# Altium PCB bootleg-1 - plate.PcbDoc
Units mm, origin at the board's own origin, x right, y up, seen from the top; angles counter-clockwise.
Board outline 296 x 105.06 mm, 2 copper layers (Component Side, Bottom Layer), stack 1.571 mm thick; 65 components, 99 nets, 179 pads, 0 vias.
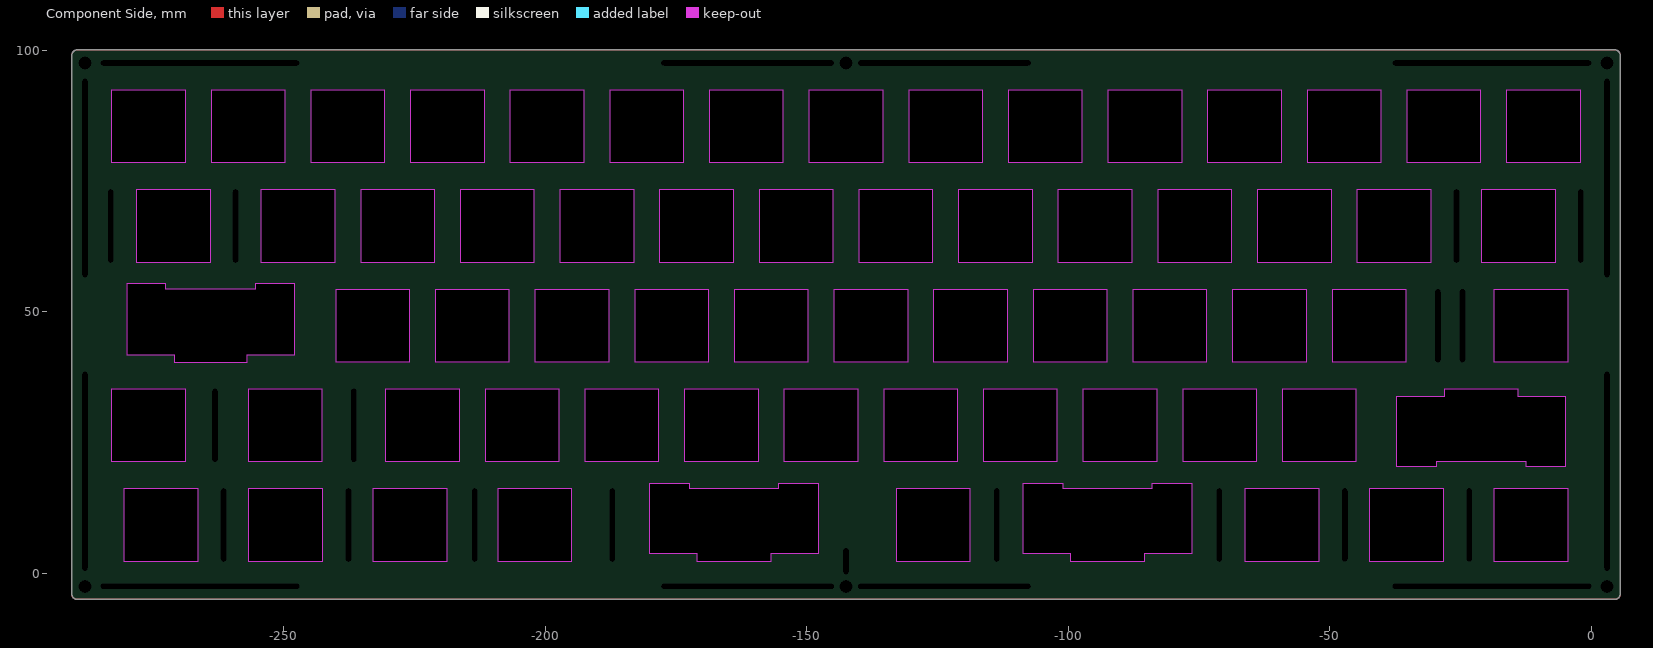
[diagram p0: Component Side view]
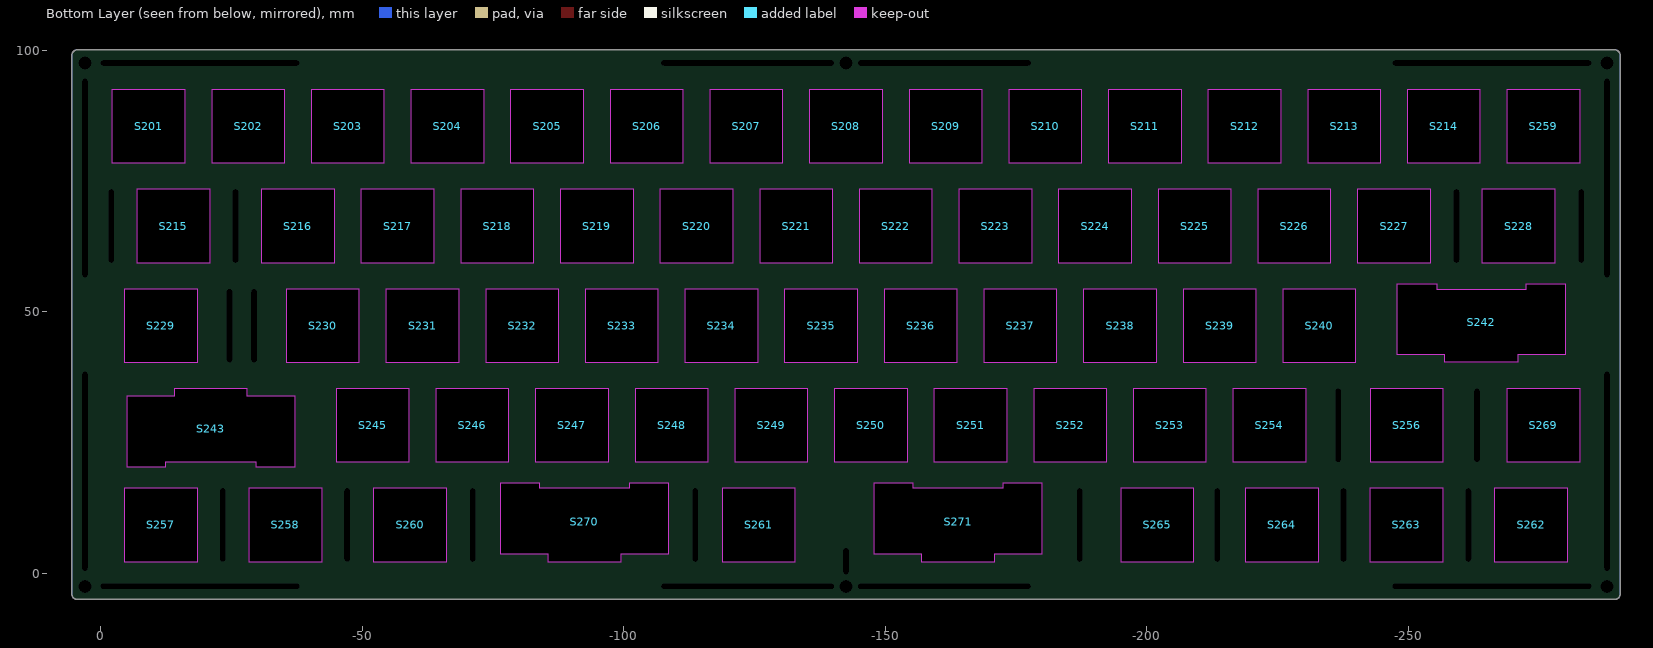
[diagram p1: Bottom Layer view, seen from below]

## Layer stack, top to bottom
Top Solder: solder mask 0.0102, Solder Resist, Dk 3.5
Component Side: signal copper 0.0356
Dielectric 1: core 1.5, FR-4, Dk 4.2
Bottom Layer: signal copper 0.0356
Solder Side: solder mask 0.0102, Solder Resist, Dk 3.5

## Board outline
-290.501,-4.017 -290.501,99.039 cw(c-289.501,99.039) -289.501,100.039 4.499,100.039 cw(c4.499,99.039) 5.499,99.039 5.499,-4.017 cw(c4.499,-4.017) 4.499,-5.017 -289.501,-5.017 cw(c-289.501,-4.017)

## Design rules (kind name [scope] priority, off if disabled: settings)
Clearance [All] p1: gap=0.2 ignorepadtopadclearanceinfootprint=FALSE except(0: Arc-Hole Track-Hole SMDPad-Hole THPad-Hole Via-Hole Fill-Hole Poly-Hole Region-Hole Text-Hole; 0.254: THPad-THPad THPad-Via THPad-Fill THPad-Poly THPad-Region THPad-Text Via-Via Via-Fill Via-Poly Via-Region Via-Text Fill-Fill Fill-Poly Fill-Region Fill-Text Poly-Poly Poly-Region Poly-Text Region-Region Region-Text Text-Text)
ComponentClearance [InComponent('No Component') And OnLayer('Component Side')] p1: gap=0.254 collisioncheckmode=3 verticalgap=0.254 showdistances=FALSE
DiffPairsRouting DiffPairsRouting_USB [InDifferentialPairClass('All Differential Pairs')] p1: maxlimit=0.254 minlimit=0.203 mostfreqgap=0.203 toplayer_minwidth=0.152 toplayer_maxwidth=0.381 toplayer_prefwidth=0.152 bottomlayer_minwidth=0.152 bottomlayer_maxwidth=0.381 bottomlayer_prefwidth=0.152 maxuncoupledlength=12.7
DiffPairsRouting [All] p2: maxlimit=0.254 minlimit=0.254 mostfreqgap=0.254 toplayer_minwidth=0.381 toplayer_maxwidth=0.381 toplayer_prefwidth=0.381 bottomlayer_minwidth=0.381 bottomlayer_maxwidth=0.381 bottomlayer_prefwidth=0.381 maxuncoupledlength=12.7
HoleSize [All] p1: absolutevalues=TRUE maxlimit=20 minlimit=0.025 maxpercent=80.000 minpercent=20.000
MatchedLengths MatchedLengths_USB_DiffPairs_1 [All] p1: tolerance=0.127 checknetsindiffpair=TRUE checkdiffpairvsdiffpair=FALSE checkxsignals=FALSE checkothers=FALSE
MatchedLengths MatchedLengths_USB_DiffPairs [All] p2: tolerance=0.127 checknetsindiffpair=TRUE checkdiffpairvsdiffpair=FALSE checkxsignals=FALSE checkothers=FALSE
PolygonConnect PolygonConnect_1 [All vs IsVia] p1: connectstyle=Direct reliefconductorwidth=0.254 reliefentries=4 polygonreliefangle="90 Angle" airgapwidth=0.254
PolygonConnect [All] p2: connectstyle=Relief reliefconductorwidth=0.254 reliefentries=4 polygonreliefangle="90 Angle" airgapwidth=0.254
RoutingVias [All] p1: holewidth=0.711 width=1.27 viastyle="Through Hole" minholewidth=0.711 minwidth=1.27 maxholewidth=0.711 maxwidth=1.27
SolderMaskExpansion [All] p1: expansion=0.102 istentingtop=FALSE
Width [All] p1: maxlimit=0.254 minlimit=0.203 preferedwidth=0.254
27 further rules are at their usual default settings.

## Classes and differential pairs
component class Designator: C201 C202 C203 C204 C205 C206
differential pair D_PRE: +D_PRE_P -D_PRE_N
differential pair D: +D_P -D_N

## Components (designator, comment, footprint, x,y, rotation, side; value= is the part's Value field where it differs from the comment)
S201 "MX" Plate_MX_1U -9.15,85.415 r180 bottom
S202 "MX" Plate_MX_1U -28.2,85.415 r180 bottom
S203 "MX" Plate_MX_1U -47.25,85.415 r180 bottom
S204 "MX" Plate_MX_1U -66.3,85.415 r180 bottom
S205 "MX" Plate_MX_1U -85.35,85.415 r180 bottom
S206 "MX" Plate_MX_1U -104.4,85.415 r180 bottom
S207 "MX" Plate_MX_1U -123.45,85.415 r180 bottom
S208 "MX" Plate_MX_1U -142.5,85.415 r180 bottom
S209 "MX" Plate_MX_1U -161.55,85.415 r180 bottom
S210 "MX" Plate_MX_1U -180.6,85.415 r180 bottom
S211 "MX" Plate_MX_1U -199.65,85.415 r180 bottom
S212 "MX" Plate_MX_1U -218.7,85.415 r180 bottom
S213 "MX" Plate_MX_1U -237.75,85.415 r180 bottom
S214 "MX" Plate_MX_1U -256.8,85.415 r180 bottom
S215 "MX" PLATE_MX_1.5U -13.912,66.365 r180 bottom
S216 "MX" Plate_MX_1U -37.725,66.365 r180 bottom
S217 "MX" Plate_MX_1U -56.775,66.365 r180 bottom
S218 "MX" Plate_MX_1U -75.825,66.365 r180 bottom
S219 "MX" Plate_MX_1U -94.875,66.365 r180 bottom
S220 "MX" Plate_MX_1U -113.925,66.365 r180 bottom
S221 "MX" Plate_MX_1U -132.975,66.365 r180 bottom
S222 "MX" Plate_MX_1U -152.025,66.365 r180 bottom
S223 "MX" Plate_MX_1U -171.075,66.365 r180 bottom
S224 "MX" Plate_MX_1U -190.125,66.365 r180 bottom
S225 "MX" Plate_MX_1U -209.175,66.365 r180 bottom
S226 "MX" Plate_MX_1U -228.225,66.365 r180 bottom
S227 "MX" Plate_MX_1U -247.275,66.365 r180 bottom
S228 "MX" PLATE_MX_1.5U -271.087,66.365 r180 bottom
S229 "MX" "PLATE_MX - CAPS - stepped" -16.294,47.315 r180 bottom
S230 "MX" Plate_MX_1U -42.487,47.315 r180 bottom
S231 "MX" Plate_MX_1U -61.537,47.315 r180 bottom
S232 "MX" Plate_MX_1U -80.587,47.315 r180 bottom
S233 "MX" Plate_MX_1U -99.637,47.315 r180 bottom
S234 "MX" Plate_MX_1U -118.687,47.315 r180 bottom
S235 "MX" Plate_MX_1U -137.737,47.315 r180 bottom
S236 "MX" Plate_MX_1U -156.787,47.315 r180 bottom
S237 "MX" Plate_MX_1U -175.837,47.315 r180 bottom
S238 "MX" Plate_MX_1U -194.887,47.315 r180 bottom
S239 "MX" Plate_MX_1U -213.937,47.315 r180 bottom
S240 "MX" Plate_MX_1U -232.987,47.315 r180 bottom
S242 "MX" "PLATE_MX - Enter_ANSI" -263.95,47.315 r0 bottom
S243 "MX" "PLATE_MX - Left shift ANSI" -21.056,28.265 r0 bottom
S245 "MX" Plate_MX_1U -52.012,28.265 r180 bottom
S246 "MX" Plate_MX_1U -71.062,28.265 r180 bottom
S247 "MX" Plate_MX_1U -90.112,28.265 r180 bottom
S248 "MX" Plate_MX_1U -109.162,28.265 r180 bottom
S249 "MX" Plate_MX_1U -128.212,28.265 r180 bottom
S250 "MX" Plate_MX_1U -147.262,28.265 r180 bottom
S251 "MX" Plate_MX_1U -166.312,28.265 r180 bottom
S252 "MX" Plate_MX_1U -185.362,28.265 r180 bottom
S253 "MX" Plate_MX_1U -204.412,28.265 r180 bottom
S254 "MX" Plate_MX_1U -223.462,28.265 r180 bottom
S256 "MX" Plate_MX_1U -249.682,28.265 r180 bottom
S257 "MX" PLATE_MX_1.5U -11.531,9.215 r180 bottom
S258 "MX" Plate_MX_1U -35.338,9.215 r180 bottom
S259 "MX" Plate_MX_1U -275.85,85.415 r180 bottom
S260 "MX" PLATE_MX_1.5U -59.156,9.215 r180 bottom
S261 "MX" PLATE_MX_1.5U -125.823,9.215 r180 bottom (schematic designator S260)
S262 "MX" PLATE_MX_1.5U -273.468,9.215 r180 bottom (schematic designator S260)
S263 "MX" PLATE_MX_1.5U -249.65,9.215 r180 bottom (schematic designator S260)
S264 "MX" PLATE_MX_1.5U -225.843,9.215 r180 bottom (schematic designator S260)
S265 "MX" PLATE_MX_1.5U -202.031,9.215 r180 bottom (schematic designator S260)
S269 "MX" Plate_MX_1U -275.85,28.265 r180 bottom
S270 "MX" "PLATE_MX - Left shift ANSI" -92.493,9.215 r180 bottom
S271 "MX" "PLATE_MX - Left shift ANSI" -163.931,9.215 r180 bottom (schematic designator S270)

## Footprints (in the part's own frame and the unit in brackets; to place one, negate y for a bottom-side part, rotate by r counter-clockwise, add the part's x,y. Pads: shape width x height; smd on the part's side, far side on the other; paste and mask are expansions set on the pad)
"PLATE_MX - CAPS - stepped" [mm]
  round 1 on Mech14: ""(-4.763,0) ""(-4.763,0)
  Component Side pour cut-out: -11.763,-7 2.238,-7 2.238,7 -11.763,7
  Keep-Out Layer board cut-out: -11.763,-7 2.238,-7 2.238,7 -11.763,7
"PLATE_MX - Enter_ANSI" [mil]
  round 157.01 on Mech14: ""(-470,-325) ""(470,-325)
  round 120 on Mech14: ""(-470,275) ""(470,275)
  round 39.37 on Mech14: ""(0,0) ""(0,0) ""(0,0)
  Keep-Out Layer board cut-out: -633.86,-313.78 -633.86,217.71 -275.59,217.72 -275.59,275.59 275.59,275.59 275.59,217.71 633.86,217.71 633.86,-313.77 333.68,-313.77 333.69,-275.58 -337.64,-275.58 -337.64,-313.78
"PLATE_MX - Left shift ANSI" [mil]
  round 120 on Mech14: ""(-470,-275) ""(470,-275)
  round 157.01 on Mech14: ""(-470,325) ""(470,325)
  round 39.37 on Mech14: ""(0,0)
  Keep-Out Layer board cut-out: 633.86,313.78 337.64,313.78 337.64,275 -337.64,275 -337.64,313.78 -635,313.78 -635,-217.73 -275.59,-217.73 -275.59,-275.59 275.59,-275.59 275.59,-217.72 633.86,-217.72
PLATE_MX_1.5U [mm]
  round 1 on Mech14: ""(0,0) ""(0,0)
  Component Side pour cut-out: -7,-7 7,-7 7,7 -7,7
  Keep-Out Layer board cut-out: -7,-7 7,-7 7,7 -7,7
Plate_MX_1U [mm]
  round 1 on Mech14: ""(0,0) ""(0,0)
  Component Side pour cut-out: -7,-7 7,-7 7,7 -7,7
  Keep-Out Layer board cut-out: -7,-7 7,-7 7,7 -7,7

## Part data
S201 S202 S203 S204 S205 S206 S207 S208 S209 S210 S211 S212 S213 S214 S216 S217 S218 S219 S220 S221 S222 S223 S224 S225 S226 S227 S228 S229 S230 S231 S232 S233 S234 S235 S236 S237 S238 S239 S240 S242 S243 S245 S246 S247 S248 S249 S250 S251 S252 S253 S254 S256 S257 S258 S259 S260 S261 S262 S263 S264 S265 S269 S270 S271: library part SW-PB, "Switch"
S215: library part SW-PB, "TAB"

## Free pads (board coordinates)
  round 0 hole 1 slot 38 at 90 deg unplated: ""(-288.001,75.538) ""(-288,19.483) ""(2.999,75.538) ""(3,19.483)
  round 0 hole 2.5 unplated: ""(-288.001,-2.517) ""(-288.001,97.539) ""(-142.501,-2.517) ""(-142.501,97.539) ""(2.999,-2.517) ""(2.999,97.539)
  round 0 hole 1 slot 14 at 90 deg unplated: ""(-283.083,66.365) ""(-263.144,28.265) ""(-261.493,9.215) ""(-259.207,66.365) ""(-237.617,9.215) ""(-236.601,28.265) ""(-213.487,9.215) ""(-187.198,9.215) ""(-113.665,9.215) ""(-71.12,9.215) ""(-47.117,9.215) ""(-29.337,47.315) ""(-25.781,66.365) ""(-24.638,47.315) ""(-23.368,9.215) ""(-2.032,66.365)
  round 0 hole 1 slot 38 at 0 deg unplated: ""(-266,-2.518) ""(-266,97.538) ""(-19.001,-2.517) ""(-19.001,97.539)
  round 0 hole 1 slot 33 at 0 deg unplated: ""(-161.301,-2.518) ""(-161.301,97.538) ""(-123.7,-2.517) ""(-123.7,97.539)
  round 0 hole 1 slot 5 at 90 deg unplated: ""(-142.494,2.286)

## Nets (pads, with @x,y where several pads share a name; then routed paths per layer and width w, separated by ;. In a path a pad name is that pad's centre, name@x,y a point inside that pad or via, vN(x,y) a via of type N, cw(c..) or ccw(c..) an arc to the next point about the centre after c; other vN are vias at no path point)
col1: 
col2: 
col3: 
col4: 
col5: 
col6: 
col7: 
col8: 
col9: 
col10: 
col11: 
col12: 
col13: 
col14: 
col15: 
D_N: 
D_P: 
D_PRE_N: 
D_PRE_P: 
GND: 
NetC301_2: 
NetC305_2: 
NetC306_2: 
NetCON301_A5: 
NetCON301_B5: 
NetD201_1: 
NetD202_1: 
NetD203_1: 
NetD204_1: 
NetD205_1: 
NetD206_1: 
NetD207_1: 
NetD208_1: 
NetD209_1: 
NetD210_1: 
NetD211_1: 
NetD212_1: 
NetD213_1: 
NetD214_1: 
NetD215_1: 
NetD216_1: 
NetD217_1: 
NetD218_1: 
NetD219_1: 
NetD220_1: 
NetD221_1: 
NetD222_1: 
NetD223_1: 
NetD224_1: 
NetD225_1: 
NetD226_1: 
NetD227_1: 
NetD228_1: 
NetD229_1: 
NetD230_1: 
NetD231_1: 
NetD232_1: 
NetD233_1: 
NetD234_1: 
NetD235_1: 
NetD236_1: 
NetD237_1: 
NetD238_1: 
NetD239_1: 
NetD240_1: 
NetD242_1: 
NetD243_1: 
NetD245_1: 
NetD246_1: 
NetD247_1: 
NetD248_1: 
NetD249_1: 
NetD250_1: 
NetD251_1: 
NetD252_1: 
NetD253_1: 
NetD254_1: 
NetD256_1: 
NetD257_1: 
NetD258_1: 
NetD259_1: 
NetD260_1: 
NetD262_1: 
NetD264_1: 
NetD265_1: 
NetD266_1: 
NetD267_1: 
NetD268_1: 
NetD269_1: 
NetD270_1: 
NetR302_1: 
PC2: 
PC4: 
PD0: 
PD2: 
PD4: 
RAW: 
RST: 
VCC: 
pads on no net: S201. S202. S203. S204. S205. S206. S207. S208. S209. S210. S211. S212. S213. S214. S215. S216. S217. S218. S219. S220. S221. S222. S223. S224. S225. S226. S227. S228. S229. S230. S231. S232. S233. S234. S235. S236. S237. S238. S239. S240. S242. S243. S245. S246. S247. S248. S249. S250. S251. S252. S253. S254. S256. S257. S258. S259. S260. S261. S262. S263. S264. S265. S269. S270. S271.

## Polygon pours and split planes (outlines as drawn)
no net on Component Side "Component Side-No Net" (solid, shelved, pour order 1): -290.501,-4.017 -290.501,99.039 cw(c-289.501,99.039) -289.501,100.039 4.499,100.039 cw(c4.499,99.039) 5.499,99.039 5.499,-4.017 cw(c4.499,-4.017) 4.499,-5.017 -289.501,-5.017 cw(c-289.501,-4.017)
no net on Bottom Layer "Bottom Layer-No Net" (solid, shelved, pour order 0): -290.501,-4.017 -290.501,99.039 cw(c-289.501,99.039) -289.501,100.039 4.499,100.039 cw(c4.499,99.039) 5.499,99.039 5.499,-4.017 cw(c4.499,-4.017) 4.499,-5.017 -289.501,-5.017 cw(c-289.501,-4.017)

## Silkscreen, mask and mechanical layers (free items; w line width, h text height)
outline:
  the board outline again, w0.013
  text "CUT OUT" at -185.928,89.535 h1.5
  text "CUT OUT" at -262.001,89.281 h1.5
  text "CUT OUT" at -204.851,89.281 h1.5
  text "CUT OUT" at -166.37,89.281 h1.5
  text "CUT OUT" at -147.32,89.281 h1.5
  text "CUT OUT" at -109.728,89.281 h1.5
  text "CUT OUT" at -90.424,89.281 h1.5
  text "CUT OUT" at -52.197,89.281 h1.5
  text "CUT OUT" at -33.02,89.281 h1.5
  text "CUT OUT" at -280.797,89.154 h1.5
  text "CUT OUT" at -242.443,89.154 h1.5
  text "CUT OUT" at -223.774,89.154 h1.5
  text "CUT OUT" at -128.651,89.154 h1.5
  text "CUT OUT" at -71.501,89.154 h1.5
  text "CUT OUT" at -14.351,89.154 h1.5
  text "CUT OUT" at -175.768,81.661 h1.5 r180
  text "CUT OUT" at -251.841,81.407 h1.5 r180
  text "CUT OUT" at -194.691,81.407 h1.5 r180
  text "CUT OUT" at -156.21,81.407 h1.5 r180
  text "CUT OUT" at -137.16,81.407 h1.5 r180
  text "CUT OUT" at -99.568,81.407 h1.5 r180
  text "CUT OUT" at -80.264,81.407 h1.5 r180
  text "CUT OUT" at -42.037,81.407 h1.5 r180
  text "CUT OUT" at -22.86,81.407 h1.5 r180
  text "CUT OUT" at -270.637,81.28 h1.5 r180
  text "CUT OUT" at -232.283,81.28 h1.5 r180
  text "CUT OUT" at -213.614,81.28 h1.5 r180
  text "CUT OUT" at -118.491,81.28 h1.5 r180
  text "CUT OUT" at -61.341,81.28 h1.5 r180
  text "CUT OUT" at -4.191,81.28 h1.5 r180
  text "CUT OUT" at -276.225,70.485 h1.5
  text "CUT OUT" at -214.376,70.485 h1.5
  text "CUT OUT" at -81.28,70.485 h1.5
  text "CUT OUT" at -61.976,70.485 h1.5
  text "CUT OUT" at -252.349,70.231 h1.5
  text "CUT OUT" at -232.791,70.231 h1.5
  text "CUT OUT" at -195.072,70.231 h1.5
  text "CUT OUT" at -176.403,70.231 h1.5
  text "CUT OUT" at -119.126,70.231 h1.5
  text "CUT OUT" at -99.949,70.231 h1.5
  text "CUT OUT" at -43.053,70.231 h1.5
  text "CUT OUT" at -18.796,70.231 h1.5
  text "CUT OUT" at -157.353,69.977 h1.5
  text "CUT OUT" at -138.176,69.977 h1.5
  text "CUT OUT" at -266.065,62.611 h1.5 r180
  text "CUT OUT" at -204.216,62.611 h1.5 r180
  text "CUT OUT" at -71.12,62.611 h1.5 r180
  text "CUT OUT" at -51.816,62.611 h1.5 r180
  text "CUT OUT" at -242.189,62.357 h1.5 r180
  text "CUT OUT" at -222.631,62.357 h1.5 r180
  text "CUT OUT" at -184.912,62.357 h1.5 r180
  text "CUT OUT" at -166.243,62.357 h1.5 r180
  text "CUT OUT" at -108.966,62.357 h1.5 r180
  text "CUT OUT" at -89.789,62.357 h1.5 r180
  text "CUT OUT" at -32.893,62.357 h1.5 r180
  text "CUT OUT" at -8.636,62.357 h1.5 r180
  text "CUT OUT" at -147.193,62.103 h1.5 r180
  text "CUT OUT" at -128.016,62.103 h1.5 r180
  text "CUT OUT" at -180.594,51.308 h1.5
  text "CUT OUT" at -161.925,51.308 h1.5
  text "CUT OUT" at -142.621,51.308 h1.5
  text "CUT OUT" at -123.698,51.308 h1.5
  text "CUT OUT" at -85.471,51.308 h1.5
  text "CUT OUT" at -269.24,51.054 h1.5
  text "CUT OUT" at -238.125,51.054 h1.5
  text "CUT OUT" at -199.771,51.054 h1.5
  text "CUT OUT" at -104.902,51.054 h1.5
  text "CUT OUT" at -67.056,51.054 h1.5
  text "CUT OUT" at -47.752,51.054 h1.5
  text "CUT OUT" at -218.821,50.927 h1.5
  text "CUT OUT" at -16.637,50.927 h1.5
  text "CUT OUT" at -170.434,43.434 h1.5 r180
  text "CUT OUT" at -151.765,43.434 h1.5 r180
  text "CUT OUT" at -132.461,43.434 h1.5 r180
  text "CUT OUT" at -113.538,43.434 h1.5 r180
  text "CUT OUT" at -75.311,43.434 h1.5 r180
  text "CUT OUT" at -259.08,43.18 h1.5 r180
  text "CUT OUT" at -227.965,43.18 h1.5 r180
  text "CUT OUT" at -189.611,43.18 h1.5 r180
  text "CUT OUT" at -94.742,43.18 h1.5 r180
  text "CUT OUT" at -56.896,43.18 h1.5 r180
  text "CUT OUT" at -37.592,43.18 h1.5 r180
  text "CUT OUT" at -208.661,43.053 h1.5 r180
  text "CUT OUT" at -6.477,43.053 h1.5 r180
  text "CUT OUT" at -227.965,32.385 h1.5
  text "CUT OUT" at -190.373,32.385 h1.5
  text "CUT OUT" at -75.946,32.385 h1.5
  text "CUT OUT" at -57.023,32.385 h1.5
  text "CUT OUT" at -280.797,32.258 h1.5
  text "CUT OUT" at -209.804,32.258 h1.5
  text "CUT OUT" at -152.908,32.258 h1.5
  text "CUT OUT" at -133.731,32.258 h1.5
  text "CUT OUT" at -26.416,32.258 h1.5
  text "CUT OUT" at -255.016,32.004 h1.5
  text "CUT OUT" at -171.323,32.004 h1.5
  text "CUT OUT" at -114.681,32.004 h1.5
  text "CUT OUT" at -94.869,32.004 h1.5
  text "CUT OUT" at -217.805,24.511 h1.5 r180
  text "CUT OUT" at -180.213,24.511 h1.5 r180
  text "CUT OUT" at -65.786,24.511 h1.5 r180
  text "CUT OUT" at -46.863,24.511 h1.5 r180
  text "CUT OUT" at -270.637,24.384 h1.5 r180
  text "CUT OUT" at -199.644,24.384 h1.5 r180
  text "CUT OUT" at -142.748,24.384 h1.5 r180
  text "CUT OUT" at -123.571,24.384 h1.5 r180
  text "CUT OUT" at -16.256,24.384 h1.5 r180
  text "CUT OUT" at -244.856,24.13 h1.5 r180
  text "CUT OUT" at -161.163,24.13 h1.5 r180
  text "CUT OUT" at -104.521,24.13 h1.5 r180
  text "CUT OUT" at -84.709,24.13 h1.5 r180
  text "CUT OUT" at -207.137,13.335 h1.5
  text "CUT OUT" at -131.064,13.335 h1.5
  text "CUT OUT" at -231.013,13.081 h1.5
  text "CUT OUT" at -169.799,13.081 h1.5
  text "CUT OUT" at -64.135,13.081 h1.5
  text "CUT OUT" at -40.386,13.081 h1.5
  text "CUT OUT" at -16.637,13.081 h1.5
  text "CUT OUT" at -278.892,12.827 h1.5
  text "CUT OUT" at -254.889,12.827 h1.5
  text "CUT OUT" at -97.536,12.827 h1.5
  text "CUT OUT" at -196.977,5.461 h1.5 r180
  text "CUT OUT" at -120.904,5.461 h1.5 r180
  text "CUT OUT" at -220.853,5.207 h1.5 r180
  text "CUT OUT" at -159.639,5.207 h1.5 r180
  text "CUT OUT" at -53.975,5.207 h1.5 r180
  text "CUT OUT" at -30.226,5.207 h1.5 r180
  text "CUT OUT" at -6.477,5.207 h1.5 r180
  text "CUT OUT" at -268.732,4.953 h1.5 r180
  text "CUT OUT" at -244.729,4.953 h1.5 r180
  text "CUT OUT" at -87.376,4.953 h1.5 r180
Mechanical 2:
  drawing of 806 lines, arcs and shapes, not listed
Mechanical 3:
  circle w0.006: c-1153.35,-206.327 r0.003
  circle w0.006: c-1153.35,-206.327 r0.003
Mechanical 4:
  circle w0.006: c-1153.35,-206.327 r0.003
  circle w0.006: c-1153.35,-206.327 r0.003
Mechanical 5:
  circle w0.006: c-1153.35,-206.327 r0.003
  circle w0.006: c-1153.35,-206.327 r0.003
Mechanical 16:
  lines w0.2: -19.304,117.729 -15.367,106.68 ; -18.669,108.077 -15.367,106.68 ; -14.224,109.601 -15.367,106.68
  text "CUT OUT, REMOVE MATERIAL FROM PCB INSIDE SQUARES" at -22.352,120.912 h1.5 r180
  text "CUT OUT, REMOVE MATERIAL FROM PCB INSIDE SQUARES" at -93.218,116.451 h1.5